# Altium PCB dc_power_backup_module_v1.PcbDoc (part 4 of 4)
Units mil, origin at the board's own origin, x right, y up, seen from the top; angles counter-clockwise.
Board outline 3300 x 2890 mil, 2 copper layers (Top Layer, Bottom Layer); 44 components, 21 nets, 171 pads, 32 vias.
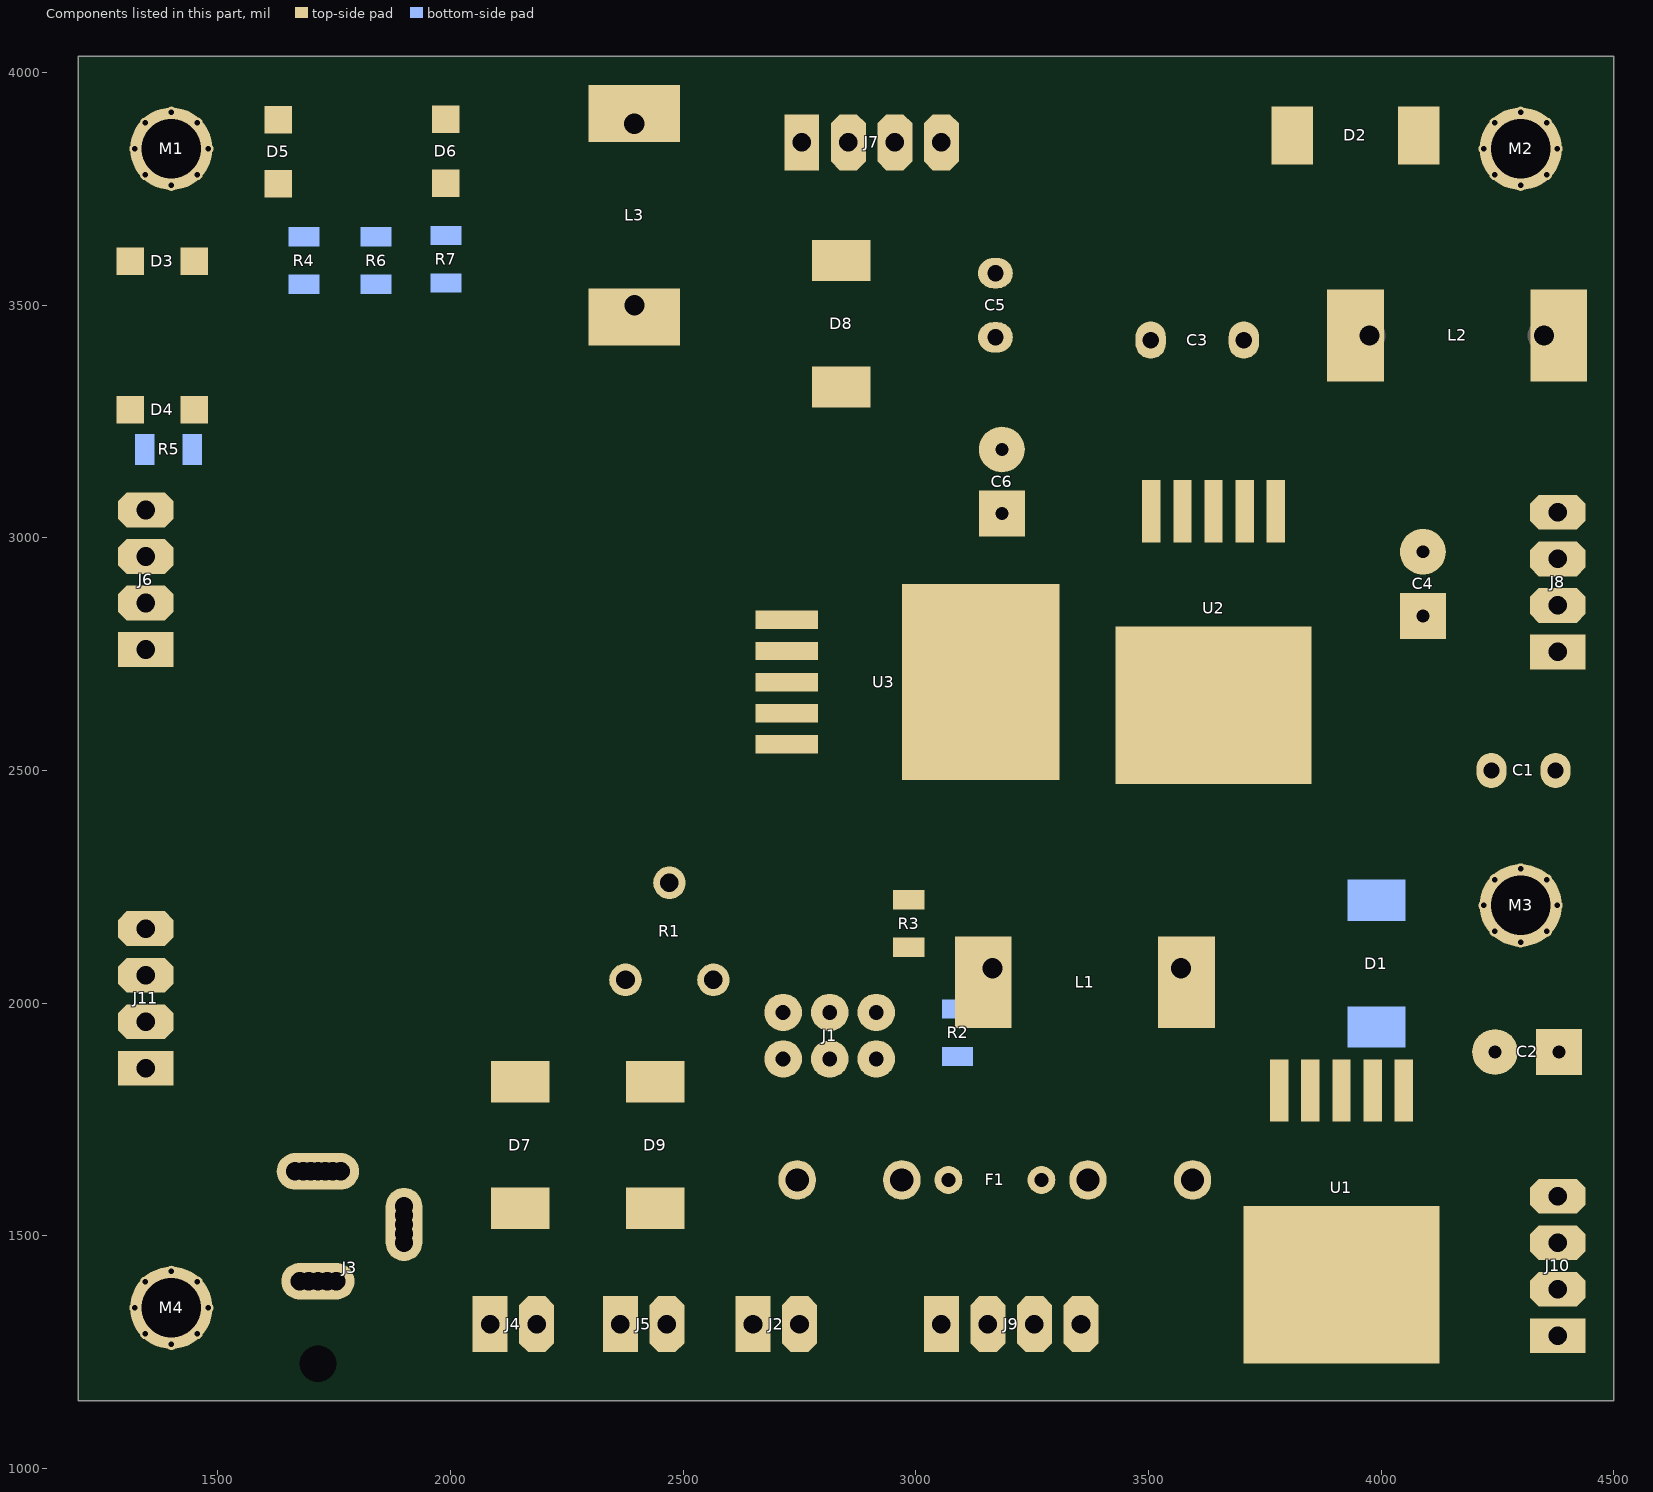
[diagram p4: the components of this part, seen from the top]

## Via types
v1: diameter 50, hole 28, Top Layer to Bottom Layer, 32 vias

## Nets (pads, with @x,y where several pads share a name; then routed paths per layer and width w, separated by ;. In a path a pad name is that pad's centre, name@x,y a point inside that pad or via, vN(x,y) a via of type N, cw(c..) or ccw(c..) an arc to the next point about the centre after c; other vN are vias at no path point) (continued)
copper on no net: (continued)
  Top Layer w0.3: 2161.4,2320.1 2163.8,2320.1 ; 2161.4,2333 2168.9,2333 ; 2161.4,2337.2 2168.9,2337.2 ; 2161.4,2337.5 2168.9,2337.5 ; 2161.4,2369.9 2168.9,2369.9 ; 2161.4,2370.2 2168.9,2370.2 ; 2161.4,2374.4 2168.9,2374.4 ; 2161.4,2462.6 2174.6,2462.6 ; 2161.4,2566.7 2164.7,2566.7 ; 2161.7,2310.5 2163.8,2310.5 ; 2161.7,2310.8 2163.8,2310.8 ; 2161.7,2311.1 2163.8,2311.1 ; 2161.7,2311.4 2163.8,2311.4 ; 2161.7,2311.7 2163.8,2311.7 ; 2161.7,2312 2163.8,2312 ; 2161.7,2312.3 2163.8,2312.3 ; 2161.7,2312.6 2163.8,2312.6 ; 2161.7,2312.9 2163.8,2312.9 ; 2161.7,2313.2 2163.8,2313.2 ; 2161.7,2313.5 2163.8,2313.5 ; 2161.7,2313.8 2163.8,2313.8 ; 2161.7,2314.1 2163.8,2314.1 ; 2161.7,2314.4 2163.8,2314.4 ; 2161.7,2314.7 2163.8,2314.7 ; 2161.7,2315 2163.8,2315 ; 2161.7,2315.3 2163.8,2315.3 ; 2161.7,2315.6 2163.8,2315.6 ; 2161.7,2315.9 2163.8,2315.9 ; 2161.7,2316.2 2163.8,2316.2 ; 2161.7,2316.5 2163.8,2316.5 ; 2161.7,2316.8 2163.8,2316.8 ; 2161.7,2317.1 2163.8,2317.1 ; 2161.7,2317.4 2163.8,2317.4 ; 2161.7,2317.7 2163.8,2317.7 ; 2161.7,2318 2163.8,2318 ; 2161.7,2318.3 2163.8,2318.3 ; 2161.7,2318.6 2163.8,2318.6 ; 2161.7,2318.9 2163.8,2318.9 ; 2161.7,2332.4 2168.6,2332.4 ; 2161.7,2332.7 2168.6,2332.7 ; 2161.7,2337.8 2168.6,2337.8 ; 2161.7,2369.6 2168.6,2369.6 ; 2161.7,2374.7 2168.9,2374.7 ; 2161.7,2375 2168.6,2375 ; 2162,2332.1 2168.3,2332.1 ; 2162,2338.1 2168.3,2338.1 ; 2162,2369.3 2168.3,2369.3 ; 2162,2375.3 2168.3,2375.3 ; 2162,2462.9 2175.2,2462.9 ; 2162,2567 2165,2567 ; 2162.3,2331.8 2168,2331.8 ; 2162.3,2338.4 2168,2338.4 ; 2162.3,2369 2168,2369 ; 2162.3,2375.6 2168,2375.6 ; 2162.3,2567.3 2165.3,2567.3 ; 2162.6,2338.7 2167.7,2338.7 ; 2162.6,2368.7 2167.7,2368.7 ; 2162.6,2567.6 2165.6,2567.6 ; 2162.6,2639 2206.1,2639 ; 2162.9,2331.5 2167.4,2331.5 ; 2162.9,2375.9 2167.4,2375.9 ; 2162.9,2463.2 2175.8,2463.2 ; 2162.9,2567.9 2166.2,2567.9 ; 2163.2,2339 2167.1,2339 ; 2163.2,2368.4 2167.1,2368.4 ; 2163.2,2376.2 2167.1,2376.2 ; 2163.2,2568.2 2166.5,2568.2 ; 2163.5,2331.2 2167.1,2331.2 ; 2163.5,2463.5 2176.4,2463.5 ; 2163.5,2568.5 2166.8,2568.5 ; 2163.8,2568.8 2167.1,2568.8 ; 2164.1,2339.3 2166.2,2339.3 ; 2164.1,2368.1 2166.2,2368.1 ; 2164.1,2463.8 2177,2463.8 ; 2164.4,2330.9 2165.9,2330.9 ; 2164.4,2376.5 2165.9,2376.5 ; 2164.4,2569.1 2167.7,2569.1 ; 2164.4,2638.7 2206.7,2638.7 ; 2164.7,2464.1 2177.6,2464.1 ; 2164.7,2569.4 2168,2569.4 ; 2165,2569.7 2168.3,2569.7 ; 2165.3,2464.4 2177.9,2464.4 ; 2165.3,2570 2168.6,2570 ; 2165.6,2570.3 2168.9,2570.3 ; 2165.9,2464.7 2178.5,2464.7 ; 2165.9,2570.6 2169.5,2570.6 ; 2165.9,2638.4 2207,2638.4 ; 2166.2,2570.9 2169.8,2570.9 ; 2166.5,2465 2179.1,2465 ; 2166.8,2571.2 2170.1,2571.2 ; 2167.1,2465.3 2179.7,2465.3 ; 2167.1,2571.5 2170.4,2571.5 ; 2167.4,2571.8 2171,2571.8 ; 2167.4,2638.1 2207.6,2638.1 ; 2167.7,2465.6 2180.3,2465.6 ; 2167.7,2572.1 2171.3,2572.1 ; 2168,2572.4 2171.6,2572.4 ; 2168.3,2465.9 2180.9,2465.9 ; 2168.3,2572.7 2171.9,2572.7 ; 2168.6,2466.2 2181.2,2466.2 ; 2168.6,2573 2172.5,2573 ; 2168.9,2573.3 2172.8,2573.3 ; 2168.9,2637.8 2207.9,2637.8 ; 2169.2,2466.5 2181.8,2466.5 ; 2169.5,2573.6 2173.1,2573.6 ; 2169.8,2466.8 2182.4,2466.8 ; 2169.8,2573.9 2173.4,2573.9 ; 2170.1,2574.2 2173.7,2574.2 ; 2170.1,2637.5 2208.5,2637.5 ; 2170.4,2467.1 2182.7,2467.1 ; 2170.4,2574.5 2174.3,2574.5 ; 2170.7,2574.8 2174.6,2574.8 ; 2171,2333 2179.7,2333 ; 2171,2374.4 2179.7,2374.4 ; 2171,2467.4 2183.3,2467.4 ; 2171,2575.1 2174.9,2575.1 ; 2171,2637.2 2209.1,2637.2 ; 2171.3,2331.5 2179.4,2331.5 ; 2171.3,2331.8 2179.4,2331.8 ; 2171.3,2332.1 2179.7,2332.1 ; 2171.3,2332.4 2179.7,2332.4 ; 2171.3,2332.7 2179.7,2332.7 ; 2171.3,2333.3 2179.7,2333.3 ; 2171.3,2333.6 2179.7,2333.6 ; 2171.3,2333.9 2179.7,2333.9 ; 2171.3,2334.2 2179.7,2334.2 ; 2171.3,2334.5 2179.4,2334.5 ; 2171.3,2334.8 2179.4,2334.8 ; 2171.3,2372.9 2179.4,2372.9 ; 2171.3,2373.2 2179.7,2373.2 ; 2171.3,2373.5 2179.7,2373.5 ; 2171.3,2373.8 2179.7,2373.8 ; 2171.3,2374.1 2179.7,2374.1 ; 2171.3,2374.7 2179.7,2374.7 ; 2171.3,2375 2179.7,2375 ; 2171.3,2375.3 2179.7,2375.3 ; 2171.3,2375.6 2179.4,2375.6 ; 2171.3,2375.9 2179.4,2375.9 ; 2171.3,2467.7 2183.9,2467.7 ; 2171.3,2575.4 2175.2,2575.4 ; 2171.6,2330.9 2179.1,2330.9 ; 2171.6,2331.2 2179.4,2331.2 ; 2171.6,2335.1 2179.4,2335.1 ; 2171.6,2372.3 2179.1,2372.3 ; 2171.6,2372.6 2179.4,2372.6 ; 2171.6,2376.2 2179.4,2376.2 ; 2171.6,2376.5 2179.1,2376.5 ; 2171.9,2330.6 2179.1,2330.6 ; 2171.9,2335.4 2179.1,2335.4 ; 2171.9,2335.7 2178.8,2335.7 ; 2171.9,2371.7 2178.8,2371.7 ; 2171.9,2372 2179.1,2372 ; 2171.9,2376.8 2179.1,2376.8 ; 2171.9,2468 2184.2,2468 ; 2171.9,2575.7 2175.8,2575.7 ; 2172.2,2330.3 2178.8,2330.3 ; 2172.2,2336 2178.5,2336 ; 2172.2,2371.4 2178.5,2371.4 ; 2172.2,2377.1 2178.8,2377.1 ; 2172.2,2576 2176.1,2576 ; 2172.2,2636.9 2209.4,2636.9 ; 2172.5,2330 2178.5,2330 ; 2172.5,2336.3 2178.2,2336.3 ; 2172.5,2371.1 2178.2,2371.1 ; 2172.5,2377.4 2178.5,2377.4 ; 2172.5,2468.3 2184.8,2468.3 ; 2172.5,2576.3 2176.4,2576.3 ; 2172.8,2329.7 2178.2,2329.7 ; 2172.8,2336.6 2177.9,2336.6 ; 2172.8,2370.8 2177.9,2370.8 ; 2172.8,2377.7 2178.2,2377.7 ; 2172.8,2468.6 2185.4,2468.6 ; 2172.8,2576.6 2176.7,2576.6 ; 2173.1,2329.4 2177.6,2329.4 ; 2173.1,2378 2177.6,2378 ; 2173.1,2576.9 2177,2576.9 ; 2173.1,2636.6 2210,2636.6 ; 2173.4,2336.9 2177.6,2336.9 ; 2173.4,2370.5 2177.3,2370.5 ; 2173.4,2468.9 2185.7,2468.9 ; 2173.4,2577.2 2177.6,2577.2 ; 2173.7,2329.1 2177,2329.1 ; 2173.7,2378.3 2177.3,2378.3 ; 2173.7,2577.5 2177.9,2577.5 ; 2174,2337.2 2176.7,2337.2 ; 2174,2469.2 2186.3,2469.2 ; 2174.3,2370.2 2176.7,2370.2 ; 2174.3,2469.5 2186.6,2469.5 ; 2174.3,2577.8 2178.2,2577.8 ; 2174.3,2636.3 2210.3,2636.3 ; 2174.6,2312.6 2177.3,2312.6 ; 2174.6,2312.9 2177.3,2312.9 ; 2174.6,2313.2 2177,2313.2 ; 2174.6,2313.5 2177,2313.5 ; 2174.6,2313.8 2177,2313.8 ; 2174.6,2314.1 2177,2314.1 ; 2174.6,2314.4 2177,2314.4 ; 2174.6,2314.7 2177,2314.7 ; 2174.6,2315 2177,2315 ; 2174.6,2315.3 2177,2315.3 ; 2174.6,2315.6 2177,2315.6 ; 2174.6,2315.9 2177.3,2315.9 ; 2174.6,2316.2 2177.3,2316.2 ; 2174.6,2578.1 2178.5,2578.1 ; 2174.9,2311.7 2177.6,2311.7 ; 2174.9,2312 2177.3,2312 ; 2174.9,2312.3 2177.3,2312.3 ; 2174.9,2316.5 2177.3,2316.5 ; 2174.9,2316.8 2177.3,2316.8 ; 2174.9,2317.1 2177.3,2317.1 ; 2174.9,2317.4 2177.6,2317.4 ; 2174.9,2378.6 2176.1,2378.6 ; 2174.9,2469.8 2187.2,2469.8 ; 2174.9,2578.4 2179.1,2578.4 ; 2175.2,2311.1 2177.6,2311.1 ; 2175.2,2311.4 2177.6,2311.4 ; 2175.2,2317.7 2177.6,2317.7 ; 2175.2,2318 2177.6,2318 ; 2175.2,2470.1 2187.5,2470.1 ; 2175.2,2578.7 2179.4,2578.7 ; 2175.2,2636 2210.9,2636 ; 2175.5,2310.5 2178.2,2310.5 ; 2175.5,2310.8 2177.9,2310.8 ; 2175.5,2318.3 2177.9,2318.3 ; 2175.5,2318.6 2177.9,2318.6 ; 2175.5,2579 2179.7,2579 ; 2175.8,2309.9 2178.5,2309.9 ; 2175.8,2310.2 2178.2,2310.2 ; 2175.8,2318.9 2178.2,2318.9 ; 2175.8,2470.4 2188.1,2470.4 ; 2175.8,2579.3 2180,2579.3 ; 2176.1,2309.6 2179.1,2309.6 ; 2176.1,2319.2 2178.5,2319.2 ; 2176.1,2579.6 2180.6,2579.6 ; 2176.1,2635.7 2211.2,2635.7 ; 2176.4,2309.3 2179.4,2309.3 ; 2176.4,2319.5 2178.5,2319.5 ; 2176.4,2470.7 2188.4,2470.7 ; 2176.7,2309 2180,2309 ; 2176.7,2319.8 2178.8,2319.8 ; 2176.7,2471 2189,2471 ; 2176.7,2579.9 2180.9,2579.9 ; 2176.7,2635.4 2211.8,2635.4 ; 2177,2320.1 2179.4,2320.1 ; 2177,2580.2 2181.2,2580.2 ; 2177.3,2320.4 2180,2320.4 ; 2177.3,2471.3 2189.3,2471.3 ; 2177.3,2580.5 2181.5,2580.5 ; 2177.6,2320.7 2181.2,2320.7 ; 2177.6,2471.6 2189.9,2471.6 ; 2177.6,2580.8 2181.8,2580.8 ; 2177.6,2635.1 2212.1,2635.1 ; 2177.9,2581.1 2182.4,2581.1 ; 2178.2,2321 2184.5,2321 ; 2178.2,2471.9 2190.2,2471.9 ; 2178.2,2581.4 2182.7,2581.4 ; 2178.5,2472.2 2190.8,2472.2 ; 2178.5,2581.7 2183,2581.7 ; 2178.5,2634.8 2212.4,2634.8 ; 2178.8,2321.3 2183.6,2321.3 ; 2179.1,2472.5 2191.1,2472.5 ; 2179.1,2582 2183.3,2582 ; 2179.1,2634.5 2213,2634.5 ; 2179.4,2472.8 2191.7,2472.8 ; 2179.4,2582.3 2183.9,2582.3 ; 2179.7,2582.6 2184.2,2582.6 ; 2180,2321.6 2182.7,2321.6 ; 2180,2473.1 2192,2473.1 ; 2180,2582.9 2184.5,2582.9 ; 2180,2634.2 2213.3,2634.2 ; 2180.3,2473.4 2192.3,2473.4 ; 2180.3,2583.2 2184.8,2583.2 ; 2180.6,2473.7 2192.9,2473.7 ; 2180.6,2583.5 2185.1,2583.5 ; 2180.6,2633.9 2213.6,2633.9 ; 2180.9,2583.8 2185.7,2583.8 ; 2181.2,2474 2193.2,2474 ; 2181.5,2329.1 2186.3,2329.1 ; 2181.5,2329.4 2187.8,2329.4 ; 2181.5,2329.7 2189.3,2329.7 ; 2181.5,2330 2190.5,2330 ; 2181.5,2330.3 2191.4,2330.3 ; 2181.5,2330.6 2192.3,2330.6 ; 2181.5,2330.9 2193.2,2330.9 ; 2181.5,2331.2 2193.8,2331.2 ; 2181.5,2331.5 2194.7,2331.5 ; 2181.5,2331.8 2195.3,2331.8 ; 2181.5,2332.1 2195.9,2332.1 ; 2181.5,2332.4 2196.5,2332.4 ; 2181.5,2332.7 2197.1,2332.7 ; 2181.5,2333 2197.7,2333 ; 2181.5,2333.3 2198,2333.3 ; 2181.5,2333.6 2198.6,2333.6 ; 2181.5,2333.9 2199.2,2333.9 ; 2181.5,2334.2 2199.5,2334.2 ; 2181.5,2334.5 2200.1,2334.5 ; 2181.5,2334.8 2200.4,2334.8 ; 2181.5,2335.1 2200.7,2335.1 ; 2181.5,2335.4 2201.3,2335.4 ; 2181.5,2335.7 2201.6,2335.7 ; 2181.5,2336 2201.9,2336 ; 2181.5,2336.3 2202.2,2336.3 ; 2181.5,2336.6 2202.5,2336.6 ; 2181.5,2336.9 2202.8,2336.9 ; 2181.5,2337.2 2203.1,2337.2 ; 2181.5,2370.2 2203.4,2370.2 ; 2181.5,2370.5 2203.1,2370.5 ; 2181.5,2370.8 2202.8,2370.8 ; 2181.5,2371.1 2202.2,2371.1 ; 2181.5,2371.4 2201.9,2371.4 ; 2181.5,2371.7 2201.6,2371.7 ; 2181.5,2372 2201.3,2372 ; 2181.5,2372.3 2201,2372.3 ; 2181.5,2372.6 2200.4,2372.6 ; 2181.5,2372.9 2200.1,2372.9 ; 2181.5,2373.2 2199.5,2373.2 ; 2181.5,2373.5 2199.2,2373.5 ; 2181.5,2373.8 2198.6,2373.8 ; 2181.5,2374.1 2198.3,2374.1 ; 2181.5,2374.4 2197.7,2374.4 ; 2181.5,2374.7 2197.1,2374.7 ; 2181.5,2375 2196.5,2375 ; 2181.5,2375.3 2195.9,2375.3 ; 2181.5,2375.6 2195.3,2375.6 ; 2181.5,2375.9 2194.7,2375.9 ; 2181.5,2376.2 2194.1,2376.2 ; 2181.5,2376.5 2193.2,2376.5 ; 2181.5,2376.8 2192.6,2376.8 ; 2181.5,2377.1 2191.7,2377.1 ; 2181.5,2377.4 2190.8,2377.4 ; 2181.5,2377.7 2189.6,2377.7 ; 2181.5,2378 2188.1,2378 ; 2181.5,2378.3 2186.6,2378.3 ; 2181.5,2378.6 2183.6,2378.6 ; 2181.5,2474.3 2193.5,2474.3 ; 2181.5,2584.1 2186,2584.1 ; 2181.5,2633.6 2214.2,2633.6 ; 2181.8,2320.7 2186,2320.7 ; 2181.8,2584.4 2186.3,2584.4 ; 2182.1,2474.6 2194.1,2474.6 ; 2182.1,2584.7 2186.6,2584.7 ; 2182.1,2633.3 2214.5,2633.3 ; 2182.4,2474.9 2194.4,2474.9 ; 2182.4,2585 2187.2,2585 ; 2182.7,2475.2 2194.7,2475.2 ; 2182.7,2585.3 2187.5,2585.3 ; 2182.7,2633 2214.8,2633 ; 2183,2320.4 2186.3,2320.4 ; 2183,2585.6 2187.8,2585.6 ; 2183.3,2337.5 2203.4,2337.5 ; 2183.3,2475.5 2195.3,2475.5 ; 2183.3,2585.9 2188.1,2585.9 ; 2183.3,2632.7 2215.1,2632.7 ; 2183.6,2309 2185.1,2309 ; 2183.6,2320.1 2186.3,2320.1 ; 2183.6,2475.8 2195.6,2475.8 ; 2183.9,2369.9 2203.7,2369.9 ; 2183.9,2586.2 2188.7,2586.2 ; 2184.2,2309.3 2185.4,2309.3 ; 2184.2,2319.8 2186.3,2319.8 ; 2184.2,2476.1 2195.9,2476.1 ; 2184.2,2586.5 2189,2586.5 ; 2184.2,2632.4 2215.7,2632.4 ; 2184.5,2309.6 2185.7,2309.6 ; 2184.5,2319.5 2186.3,2319.5 ; 2184.5,2476.4 2196.5,2476.4 ; 2184.5,2586.8 2189.3,2586.8 ; 2184.8,2309.9 2186,2309.9 ; 2184.8,2318.9 2186.3,2318.9 ; 2184.8,2319.2 2186.3,2319.2 ; 2184.8,2476.7 2196.8,2476.7 ; 2184.8,2587.1 2189.6,2587.1 ; 2184.8,2632.1 2216,2632.1 ; 2185.1,2310.2 2186.3,2310.2 ; 2185.1,2318.3 2186.3,2318.3 ; 2185.1,2318.6 2186.3,2318.6 ; 2185.1,2321 2186,2321 ; 2185.1,2587.4 2189.9,2587.4 ; 2185.4,2310.5 2186.3,2310.5 ; 2185.4,2317.7 2186.3,2317.7 ; 2185.4,2318 2186.3,2318 ; 2185.4,2321.3 2186,2321.3 ; 2185.4,2321.6 2186,2321.6 ; 2185.4,2337.8 2203.7,2337.8 ; 2185.4,2477 2197.1,2477 ; 2185.4,2587.7 2190.5,2587.7 ; 2185.4,2631.8 2216.3,2631.8 ; 2185.7,2310.8 2186.6,2310.8 ; 2185.7,2311.1 2186.6,2311.1 ; 2185.7,2317.1 2186.3,2317.1 ; 2185.7,2317.4 2186.3,2317.4 ; 2185.7,2477.3 2197.4,2477.3 ; 2185.7,2588 2190.8,2588 ; 2186,2311.4 2186.3,2311.4 ; 2186,2369.6 2204,2369.6 ; 2186,2477.6 2198,2477.6 ; 2186,2588.3 2191.1,2588.3 ; 2186,2631.5 2216.6,2631.5 ; 2186.3,2477.9 2198.3,2477.9 ; 2186.6,2588.6 2191.4,2588.6 ; 2186.6,2631.2 2216.9,2631.2 ; 2186.9,2338.1 2204,2338.1 ; 2186.9,2478.2 2198.6,2478.2 ; 2186.9,2588.9 2192,2588.9 ; 2187.2,2369.3 2204.3,2369.3 ; 2187.2,2478.5 2198.9,2478.5 ; 2187.2,2589.2 2192.3,2589.2 ; 2187.2,2630.9 2217.2,2630.9 ; 2187.5,2478.8 2199.2,2478.8 ; 2187.5,2589.5 2192.6,2589.5 ; 2187.5,2630.6 2217.8,2630.6 ; 2187.8,2589.8 2192.9,2589.8 ; 2188.1,2338.4 2204.3,2338.4 ; 2188.1,2369 2204.6,2369 ; 2188.1,2479.1 2199.8,2479.1 ; 2188.1,2590.1 2193.2,2590.1 ; 2188.1,2630.3 2218.1,2630.3 ; 2188.4,2479.4 2200.1,2479.4 ; 2188.4,2590.4 2193.8,2590.4 ; 2188.7,2479.7 2200.4,2479.7 ; 2188.7,2630 2218.4,2630 ; 2189,2338.7 2204.6,2338.7 ; 2189,2368.7 2204.6,2368.7 ; 2189,2480 2200.7,2480 ; 2189,2590.7 2194.1,2590.7 ; 2189.3,2480.3 2201,2480.3 ; 2189.3,2591 2194.4,2591 ; 2189.3,2629.7 2218.7,2629.7 ; 2189.6,2339 2204.9,2339 ; 2189.6,2591.3 2194.7,2591.3 ; 2189.9,2368.4 2204.9,2368.4 ; 2189.9,2480.6 2201.6,2480.6 ; 2189.9,2591.6 2195.3,2591.6 ; 2189.9,2629.4 2219,2629.4 ; 2190.2,2480.9 2201.9,2480.9 ; 2190.2,2591.9 2195.6,2591.9 ; 2190.5,2339.3 2205.2,2339.3 ; 2190.5,2481.2 2202.2,2481.2 ; 2190.5,2592.2 2195.9,2592.2 ; 2190.5,2629.1 2219.3,2629.1 ; 2190.8,2368.1 2205.2,2368.1 ; 2190.8,2481.5 2202.5,2481.5 ; 2190.8,2592.5 2196.2,2592.5 ; 2190.8,2628.8 2219.6,2628.8 ; 2191.1,2339.6 2205.5,2339.6 ; 2191.1,2481.8 2202.8,2481.8 ; 2191.4,2367.8 2205.5,2367.8 ; 2191.4,2592.8 2196.8,2592.8 ; 2191.4,2628.5 2219.9,2628.5 ; 2191.7,2339.9 2205.5,2339.9 ; 2191.7,2482.1 2203.1,2482.1 ; 2191.7,2593.1 2197.1,2593.1 ; 2192,2367.5 2205.8,2367.5 ; 2192,2482.4 2203.4,2482.4 ; 2192,2593.4 2197.4,2593.4 ; 2192,2628.2 2220.2,2628.2 ; 2192.3,2340.2 2205.8,2340.2 ; 2192.3,2482.7 2203.7,2482.7 ; 2192.3,2593.7 2197.7,2593.7 ; 2192.3,2627.9 2220.5,2627.9 ; 2192.6,2367.2 2205.8,2367.2 ; 2192.6,2483 2204,2483 ; 2192.6,2594 2198,2594 ; 2192.9,2340.5 2206.1,2340.5 ; 2192.9,2483.3 2204.6,2483.3 ; 2192.9,2594.3 2198.6,2594.3 ; 2192.9,2627.6 2220.8,2627.6 ; 2193.2,2366.9 2206.1,2366.9 ; 2193.2,2483.6 2204.9,2483.6 ; 2193.2,2594.6 2198.9,2594.6 ; 2193.5,2340.8 2206.4,2340.8 ; 2193.5,2366.6 2206.4,2366.6 ; 2193.5,2483.9 2205.2,2483.9 ; 2193.5,2627.3 2221.1,2627.3 ; 2193.8,2484.2 2205.5,2484.2 ; 2193.8,2594.9 2199.2,2594.9 ; 2193.8,2627 2221.4,2627 ; 2194.1,2341.1 2206.4,2341.1 ; 2194.1,2366.3 2206.7,2366.3 ; 2194.1,2484.5 2205.8,2484.5 ; 2194.1,2595.2 2199.5,2595.2 ; 2194.4,2341.4 2206.7,2341.4 ; 2194.4,2595.5 2200.1,2595.5 ; 2194.4,2626.7 2221.7,2626.7 ; 2194.7,2366 2206.7,2366 ; 2194.7,2484.8 2206.1,2484.8 ; 2194.7,2595.8 2200.4,2595.8 ; 2194.7,2626.4 2222,2626.4 ; 2195,2341.7 2207,2341.7 ; 2195,2365.7 2207,2365.7 ; 2195,2485.1 2206.4,2485.1 ; 2195,2596.1 2200.7,2596.1 ; 2195.3,2342 2207,2342 ; 2195.3,2365.4 2207.3,2365.4 ; 2195.3,2485.4 2206.7,2485.4 ; 2195.3,2596.4 2201,2596.4 ; 2195.3,2626.1 2222.3,2626.1 ; 2195.6,2342.3 2207.3,2342.3 ; 2195.6,2485.7 2207,2485.7 ; 2195.6,2596.7 2201.3,2596.7 ; 2195.9,2342.6 2207.6,2342.6 ; 2195.9,2365.1 2207.3,2365.1 ; 2195.9,2486 2207.3,2486 ; 2195.9,2625.8 2222.6,2625.8 ; 2196.2,2364.8 2207.6,2364.8 ; 2196.2,2486.3 2207.6,2486.3 ; 2196.2,2597 2201.9,2597 ; 2196.2,2625.5 2222.6,2625.5 ; 2196.5,2342.9 2207.6,2342.9 ; 2196.5,2364.5 2207.6,2364.5 ; 2196.5,2486.6 2207.9,2486.6 ; 2196.5,2597.3 2202.2,2597.3 ; 2196.8,2343.2 2207.9,2343.2 ; 2196.8,2364.2 2207.9,2364.2 ; 2196.8,2486.9 2208.2,2486.9 ; 2196.8,2597.6 2202.5,2597.6 ; 2196.8,2625.2 2222.9,2625.2 ; 2197.1,2343.5 2207.9,2343.5 ; 2197.1,2363.9 2207.9,2363.9 ; 2197.1,2487.2 2208.5,2487.2 ; 2197.1,2597.9 2202.8,2597.9 ; 2197.1,2624.9 2223.2,2624.9 ; 2197.4,2343.8 2208.2,2343.8 ; 2197.4,2363.6 2208.2,2363.6 ; 2197.4,2487.5 2208.8,2487.5 ; 2197.4,2598.2 2203.4,2598.2 ; 2197.7,2344.1 2208.2,2344.1 ; 2197.7,2363.3 2208.2,2363.3 ; 2197.7,2487.8 2209.1,2487.8 ; 2197.7,2598.5 2203.7,2598.5 ; 2197.7,2624.6 2223.5,2624.6 ; 2198,2344.4 2208.5,2344.4 ; 2198,2363 2208.5,2363 ; 2198,2488.1 2209.4,2488.1 ; 2198,2598.8 2204,2598.8 ; 2198,2624.3 2223.8,2624.3 ; 2198.3,2344.7 2208.5,2344.7 ; 2198.3,2362.7 2208.5,2362.7 ; 2198.3,2488.4 2209.7,2488.4 ; 2198.3,2624 2224.1,2624 ; 2198.6,2345 2208.8,2345 ; 2198.6,2345.3 2208.8,2345.3 ; 2198.6,2362.4 2208.8,2362.4 ; 2198.6,2488.7 2210,2488.7 ; 2198.6,2599.1 2204.3,2599.1 ; 2198.9,2345.6 2208.8,2345.6 ; 2198.9,2361.8 2209.1,2361.8 ; 2198.9,2362.1 2208.8,2362.1 ; 2198.9,2489 2210.3,2489 ; 2198.9,2599.4 2204.9,2599.4 ; 2198.9,2623.7 2224.1,2623.7 ; 2199.2,2345.9 2209.1,2345.9 ; 2199.2,2361.5 2209.1,2361.5 ; 2199.2,2489.3 2210.6,2489.3 ; 2199.2,2599.7 2205.2,2599.7 ; 2199.2,2623.4 2224.4,2623.4 ; 2199.5,2346.2 2209.1,2346.2 ; 2199.5,2346.5 2209.4,2346.5 ; 2199.5,2361.2 2209.1,2361.2 ; 2199.5,2489.6 2210.9,2489.6 ; 2199.5,2600 2205.5,2600 ; 2199.8,2346.8 2209.4,2346.8 ; 2199.8,2360.6 2209.4,2360.6 ; 2199.8,2360.9 2209.4,2360.9 ; 2199.8,2489.9 2211.2,2489.9 ; 2199.8,2600.3 2205.8,2600.3 ; 2199.8,2623.1 2224.7,2623.1 ; 2200.1,2347.1 2209.4,2347.1 ; 2200.1,2347.4 2209.7,2347.4 ; 2200.1,2360 2209.7,2360 ; 2200.1,2360.3 2209.4,2360.3 ; 2200.1,2490.2 2211.2,2490.2 ; 2200.1,2490.5 2211.5,2490.5 ; 2200.1,2600.6 2206.1,2600.6 ; 2200.1,2622.8 2225,2622.8 ; 2200.4,2347.7 2209.7,2347.7 ; 2200.4,2348 2209.7,2348 ; 2200.4,2359.4 2209.7,2359.4 ; 2200.4,2359.7 2209.7,2359.7 ; 2200.4,2490.8 2211.8,2490.8 ; 2200.4,2600.9 2206.7,2600.9 ; 2200.4,2622.5 2233.1,2622.5 ; 2200.7,2348.3 2209.7,2348.3 ; 2200.7,2348.6 2210,2348.6 ; 2200.7,2358.8 2210,2358.8 ; 2200.7,2359.1 2209.7,2359.1 ; 2200.7,2491.1 2212.1,2491.1 ; 2201,2348.9 2210,2348.9 ; 2201,2349.2 2210,2349.2 ; 2201,2358.2 2210,2358.2 ; 2201,2358.5 2210,2358.5 ; 2201,2491.4 2212.4,2491.4 ; 2201,2601.2 2207,2601.2 ; 2201,2622.2 2232.8,2622.2 ; 2201.3,2349.5 2210,2349.5 ; 2201.3,2349.8 2210,2349.8 ; 2201.3,2350.1 2210.3,2350.1 ; 2201.3,2357.3 2210.3,2357.3 ; 2201.3,2357.6 2210.3,2357.6 ; 2201.3,2357.9 2210,2357.9 ; 2201.3,2491.7 2212.7,2491.7 ; 2201.3,2601.5 2207.3,2601.5 ; 2201.3,2621.9 2232.5,2621.9 ; 2201.6,2350.4 2210.3,2350.4 ; 2201.6,2350.7 2210.3,2350.7 ; 2201.6,2351 2210.3,2351 ; 2201.6,2351.3 2210.3,2351.3 ; 2201.6,2351.6 2210.3,2351.6 ; 2201.6,2355.8 2210.3,2355.8 ; 2201.6,2356.1 2210.3,2356.1 ; 2201.6,2356.4 2210.3,2356.4 ; 2201.6,2356.7 2210.3,2356.7 ; 2201.6,2357 2210.3,2357 ; 2201.6,2492 2213,2492 ; 2201.6,2601.8 2207.6,2601.8 ; 2201.6,2621.6 2231.9,2621.6 ; 2201.9,2351.9 2210.3,2351.9 ; 2201.9,2352.2 2210.3,2352.2 ; 2201.9,2352.5 2210.3,2352.5 ; 2201.9,2352.8 2210.3,2352.8 ; 2201.9,2353.1 2210.6,2353.1 ; 2201.9,2353.4 2210.6,2353.4 ; 2201.9,2353.7 2210.6,2353.7 ; 2201.9,2354 2210.6,2354 ; 2201.9,2354.3 2210.6,2354.3 ; 2201.9,2354.6 2210.6,2354.6 ; 2201.9,2354.9 2210.3,2354.9 ; 2201.9,2355.2 2210.3,2355.2 ; 2201.9,2355.5 2210.3,2355.5 ; 2201.9,2492.3 2213.3,2492.3 ; 2201.9,2602.1 2208.2,2602.1 ; 2202.2,2492.6 2213.6,2492.6 ; 2202.2,2602.4 2208.5,2602.4 ; 2202.2,2621.3 2231.6,2621.3 ; 2202.5,2492.9 2213.6,2492.9 ; 2202.5,2602.7 2208.8,2602.7 ; 2202.5,2621 2231.3,2621 ; 2202.8,2493.2 2213.9,2493.2 ; 2202.8,2493.5 2214.2,2493.5 ; 2202.8,2603 2209.1,2603 ; 2202.8,2620.7 2231,2620.7 ; 2203.1,2493.8 2214.5,2493.8 ; 2203.1,2603.3 2209.4,2603.3 ; 2203.4,2494.1 2214.8,2494.1 ; 2203.4,2620.4 2230.4,2620.4 ; 2203.7,2494.4 2215.1,2494.4 ; 2203.7,2603.6 2210,2603.6 ; 2203.7,2620.1 2230.1,2620.1 ; 2204,2494.7 2215.4,2494.7 ; 2204,2603.9 2210.3,2603.9 ; 2204,2619.8 2229.8,2619.8 ; 2204.3,2495 2215.4,2495 ; 2204.3,2495.3 2215.7,2495.3 ; 2204.3,2604.2 2210.6,2604.2 ; 2204.3,2619.5 2229.5,2619.5 ; 2204.6,2495.6 2216,2495.6 ; 2204.6,2604.5 2210.9,2604.5 ; 2204.6,2619.2 2229.2,2619.2 ; 2204.9,2495.9 2216.3,2495.9 ; 2204.9,2604.8 2211.5,2604.8 ; 2205.2,2496.2 2216.6,2496.2 ; 2205.2,2605.1 2211.8,2605.1 ; 2205.2,2618.9 2228.6,2618.9 ; 2205.5,2496.5 2216.6,2496.5 ; 2205.5,2496.8 2216.9,2496.8 ; 2205.5,2605.4 2212.1,2605.4 ; 2205.5,2618.6 2228.3,2618.6 ; 2205.8,2497.1 2217.2,2497.1 ; 2205.8,2618.3 2228,2618.3 ; 2206.1,2497.4 2217.5,2497.4 ; 2206.1,2605.7 2212.4,2605.7 ; 2206.1,2618 2228.3,2618 ; 2206.4,2497.7 2217.8,2497.7 ; 2206.4,2606 2213,2606 ; 2206.4,2617.7 2228.3,2617.7 ; 2206.7,2498 2217.8,2498 ; 2206.7,2498.3 2218.1,2498.3 ; 2206.7,2606.3 2213.3,2606.3 ; 2206.7,2617.4 2228.6,2617.4 ; 2207,2498.6 2218.4,2498.6 ; 2207,2606.6 2213.6,2606.6 ; 2207,2617.1 2228.9,2617.1 ; 2207.3,2498.9 2218.7,2498.9 ; 2207.3,2606.9 2213.9,2606.9 ; 2207.3,2616.8 2228.9,2616.8 ; 2207.6,2499.2 2218.7,2499.2 ; 2207.6,2499.5 2219,2499.5 ; 2207.6,2607.2 2214.2,2607.2 ; 2207.9,2499.8 2219.3,2499.8 ; 2207.9,2607.5 2214.8,2607.5 ; 2207.9,2616.5 2229.2,2616.5 ; 2208.2,2500.1 2219.6,2500.1 ; 2208.2,2616.2 2229.2,2616.2 ; 2208.5,2500.4 2219.6,2500.4 ; 2208.5,2500.7 2219.9,2500.7 ; 2208.5,2607.8 2215.1,2607.8 ; 2208.5,2615.9 2229.5,2615.9 ; 2208.8,2501 2220.2,2501 ; 2208.8,2608.1 2234,2608.1 ; 2208.8,2615.6 2229.8,2615.6 ; 2209.1,2501.3 2220.5,2501.3 ; 2209.1,2608.4 2233.7,2608.4 ; 2209.1,2615.3 2229.8,2615.3 ; 2209.4,2501.6 2220.5,2501.6 ; 2209.4,2501.9 2220.8,2501.9 ; 2209.4,2608.7 2233.7,2608.7 ; 2209.4,2615 2230.1,2615 ; 2209.7,2502.2 2221.1,2502.2 ; 2209.7,2609 2233.4,2609 ; 2209.7,2614.7 2230.1,2614.7 ; 2210,2502.5 2221.1,2502.5 ; 2210,2502.8 2221.4,2502.8 ; 2210,2609.3 2233.4,2609.3 ; 2210,2614.4 2230.4,2614.4 ; 2210.3,2503.1 2221.7,2503.1 ; 2210.3,2609.6 2233.1,2609.6 ; 2210.3,2614.1 2230.7,2614.1 ; 2210.6,2503.4 2221.7,2503.4 ; 2210.6,2503.7 2222,2503.7 ; 2210.6,2613.8 2230.7,2613.8 ; 2210.9,2504 2222.3,2504 ; 2210.9,2609.9 2233.1,2609.9 ; 2210.9,2613.2 2231,2613.2 ; 2210.9,2613.5 2231,2613.5 ; 2211.2,2504.3 2222.6,2504.3 ; 2211.2,2504.6 2222.6,2504.6 ; 2211.2,2610.2 2232.8,2610.2 ; 2211.2,2612.9 2231.3,2612.9 ; 2211.5,2504.9 2222.9,2504.9 ; 2211.5,2610.5 2232.5,2610.5 ; 2211.5,2612.6 2231.6,2612.6 ; 2211.8,2505.2 2223.2,2505.2 ; 2211.8,2505.5 2223.2,2505.5 ; 2211.8,2610.8 2232.5,2610.8 ; 2211.8,2612.3 2231.6,2612.3 ; 2212.1,2505.8 2223.5,2505.8 ; 2212.1,2611.1 2232.2,2611.1 ; 2212.1,2612 2231.9,2612 ; 2212.4,2506.1 2223.5,2506.1 ; 2212.4,2506.4 2223.8,2506.4 ; 2212.4,2611.4 2232.2,2611.4 ; 2212.4,2611.7 2231.9,2611.7 ; 2212.7,2506.7 2224.1,2506.7 ; 2213,2507 2224.1,2507 ; 2213,2507.3 2224.4,2507.3 ; 2213.3,2507.6 2224.7,2507.6 ; 2213.3,2507.9 2224.7,2507.9 ; 2213.6,2508.2 2225,2508.2 ; 2213.9,2508.5 2225.3,2508.5 ; 2213.9,2508.8 2225.3,2508.8 ; 2214.2,2509.1 2225.6,2509.1 ; 2214.2,2509.4 2225.6,2509.4 ; 2214.5,2509.7 2225.9,2509.7 ; 2214.8,2510 2226.2,2510 ; 2214.8,2510.3 2226.2,2510.3 ; 2215.1,2510.6 2226.5,2510.6 ; 2215.1,2510.9 2226.5,2510.9 ; 2215.4,2511.2 2226.8,2511.2 ; 2215.4,2511.5 2227.1,2511.5 ; 2215.4,2607.8 2234,2607.8 ; 2215.7,2511.8 2227.1,2511.8 ; 2215.7,2607.5 2234.3,2607.5 ; 2216,2512.1 2227.4,2512.1 ; 2216,2512.4 2227.4,2512.4 ; 2216,2607.2 2234.3,2607.2 ; 2216.3,2512.7 2227.7,2512.7 ; 2216.3,2513 2227.7,2513 ; 2216.3,2606.6 2234.6,2606.6 ; 2216.3,2606.9 2234.6,2606.9 ; 2216.6,2513.3 2228,2513.3 ; 2216.6,2513.6 2228.3,2513.6 ; 2216.6,2606.3 2234.9,2606.3 ; 2216.9,2513.9 2228.3,2513.9 ; 2216.9,2514.2 2228.6,2514.2 ; 2216.9,2606 2234.9,2606 ; 2217.2,2514.5 2228.6,2514.5 ; 2217.2,2514.8 2228.9,2514.8 ; 2217.2,2605.4 2235.2,2605.4 ; 2217.2,2605.7 2235.2,2605.7 ; 2217.5,2515.1 2228.9,2515.1 ; 2217.5,2515.4 2229.2,2515.4 ; 2217.5,2605.1 2235.5,2605.1 ; 2217.8,2515.7 2229.2,2515.7 ; 2217.8,2516 2229.5,2516 ; 2217.8,2604.5 2235.8,2604.5 ; 2217.8,2604.8 2235.5,2604.8 ; 2218.1,2516.3 2229.8,2516.3 ; 2218.1,2516.6 2229.8,2516.6 ; 2218.1,2603.9 2236.1,2603.9 ; 2218.1,2604.2 2235.8,2604.2 ; 2218.4,2516.9 2230.1,2516.9 ; 2218.4,2517.2 2230.1,2517.2 ; 2218.4,2603.6 2236.1,2603.6 ; 2218.7,2517.5 2230.4,2517.5 ; 2218.7,2517.8 2230.4,2517.8 ; 2218.7,2603 2236.4,2603 ; 2218.7,2603.3 2236.4,2603.3 ; 2219,2518.1 2230.7,2518.1 ; 2219,2518.4 2230.7,2518.4 ; 2219,2602.7 2236.7,2602.7 ; 2219.3,2518.7 2231,2518.7 ; 2219.3,2519 2231,2519 ; 2219.3,2602.1 2236.7,2602.1 ; 2219.3,2602.4 2236.7,2602.4 ; 2219.6,2519.3 2231.3,2519.3 ; 2219.6,2519.6 2231.3,2519.6 ; 2219.6,2601.5 2237,2601.5 ; 2219.6,2601.8 2237,2601.8 ; 2219.9,2519.9 2231.6,2519.9 ; 2219.9,2520.2 2231.6,2520.2 ; 2219.9,2520.5 2231.9,2520.5 ; 2219.9,2601.2 2237.3,2601.2 ; 2220.2,2520.8 2231.9,2520.8 ; 2220.2,2521.1 2232.2,2521.1 ; 2220.2,2600.6 2237.3,2600.6 ; 2220.2,2600.9 2237.3,2600.9 ; 2220.5,2521.4 2232.2,2521.4 ; 2220.5,2521.7 2232.5,2521.7 ; 2220.5,2600 2237.6,2600 ; 2220.5,2600.3 2237.6,2600.3 ; 2220.8,2522 2232.5,2522 ; 2220.8,2522.3 2232.8,2522.3 ; 2220.8,2599.4 2237.9,2599.4 ; 2220.8,2599.7 2237.9,2599.7 ; 2221.1,2522.6 2232.8,2522.6 ; 2221.1,2522.9 2233.1,2522.9 ; 2221.1,2523.2 2233.1,2523.2 ; 2221.1,2598.8 2238.2,2598.8 ; 2221.1,2599.1 2237.9,2599.1 ; 2221.4,2523.5 2233.4,2523.5 ; 2221.4,2523.8 2233.4,2523.8 ; 2221.4,2598.2 2238.2,2598.2 ; 2221.4,2598.5 2238.2,2598.5 ; 2221.7,2524.1 2233.4,2524.1 ; 2221.7,2524.4 2233.7,2524.4 ; 2221.7,2524.7 2233.7,2524.7 ; 2221.7,2597.6 2238.5,2597.6 ; 2221.7,2597.9 2238.5,2597.9 ; 2222,2525 2234,2525 ; 2222,2525.3 2234,2525.3 ; 2222,2597 2238.8,2597 ; 2222,2597.3 2238.5,2597.3 ; 2222.3,2525.6 2234.3,2525.6 ; 2222.3,2525.9 2234.3,2525.9 ; 2222.3,2526.2 2234.6,2526.2 ; 2222.3,2596.4 2238.8,2596.4 ; 2222.3,2596.7 2238.8,2596.7 ; 2222.6,2526.5 2234.6,2526.5 ; 2222.6,2526.8 2234.9,2526.8 ; 2222.6,2527.1 2234.9,2527.1 ; 2222.6,2595.8 2239.1,2595.8 ; 2222.6,2596.1 2239.1,2596.1 ; 2222.9,2527.4 2234.9,2527.4 ; 2222.9,2527.7 2235.2,2527.7 ; 2222.9,2528 2235.2,2528 ; 2222.9,2595.2 2239.4,2595.2 ; 2222.9,2595.5 2239.1,2595.5 ; 2223.2,2528.3 2235.5,2528.3 ; 2223.2,2528.6 2235.5,2528.6 ; 2223.2,2594.3 2239.4,2594.3 ; 2223.2,2594.6 2239.4,2594.6 ; 2223.2,2594.9 2239.4,2594.9 ; 2223.5,2528.9 2235.8,2528.9 ; 2223.5,2529.2 2235.8,2529.2 ; 2223.5,2529.5 2235.8,2529.5 ; 2223.5,2593.7 2239.7,2593.7 ; 2223.5,2594 2239.7,2594 ; 2223.8,2529.8 2236.1,2529.8 ; 2223.8,2530.1 2236.1,2530.1 ; 2223.8,2530.4 2236.4,2530.4 ; 2223.8,2592.8 2239.7,2592.8 ; 2223.8,2593.1 2239.7,2593.1 ; 2223.8,2593.4 2239.7,2593.4 ; 2224.1,2530.7 2236.4,2530.7 ; 2224.1,2531 2236.7,2531 ; 2224.1,2531.3 2236.7,2531.3 ; 2224.1,2592.2 2240,2592.2 ; 2224.1,2592.5 2240,2592.5 ; 2224.4,2531.6 2236.7,2531.6 ; 2224.4,2531.9 2237,2531.9 ; 2224.4,2532.2 2237,2532.2 ; 2224.4,2532.5 2237,2532.5 ; 2224.4,2591.3 2240.3,2591.3 ; 2224.4,2591.6 2240,2591.6 ; 2224.4,2591.9 2240,2591.9 ; 2224.7,2532.8 2237.3,2532.8 ; 2224.7,2533.1 2237.3,2533.1 ; 2224.7,2533.4 2237.3,2533.4 ; 2224.7,2590.4 2240.3,2590.4 ; 2224.7,2590.7 2240.3,2590.7 ; 2224.7,2591 2240.3,2591 ; 2225,2533.7 2237.6,2533.7 ; 2225,2534 2237.6,2534 ; 2225,2534.3 2237.6,2534.3 ; 2225,2589.8 2240.6,2589.8 ; 2225,2590.1 2240.3,2590.1 ; 2225.3,2534.6 2237.9,2534.6 ; 2225.3,2534.9 2237.9,2534.9 ; 2225.3,2535.2 2237.9,2535.2 ; 2225.3,2535.5 2238.2,2535.5 ; 2225.3,2588.9 2240.6,2588.9 ; 2225.3,2589.2 2240.6,2589.2 ; 2225.3,2589.5 2240.6,2589.5 ; 2225.6,2535.8 2238.2,2535.8 ; 2225.6,2536.1 2238.2,2536.1 ; 2225.6,2536.4 2238.2,2536.4 ; 2225.6,2536.7 2238.5,2536.7 ; 2225.6,2588 2240.9,2588 ; 2225.6,2588.3 2240.9,2588.3 ; 2225.6,2588.6 2240.6,2588.6 ; 2225.6,2622.8 2233.4,2622.8 ; 2225.9,2537 2238.5,2537 ; 2225.9,2537.3 2238.5,2537.3 ; 2225.9,2537.6 2238.8,2537.6 ; 2225.9,2537.9 2238.8,2537.9 ; 2225.9,2586.8 2240.9,2586.8 ; 2225.9,2587.1 2240.9,2587.1 ; 2225.9,2587.4 2240.9,2587.4 ; 2225.9,2587.7 2240.9,2587.7 ; 2225.9,2623.1 2233.7,2623.1 ; 2226.2,2538.2 2238.8,2538.2 ; 2226.2,2538.5 2238.8,2538.5 ; 2226.2,2538.8 2239.1,2538.8 ; 2226.2,2539.1 2239.1,2539.1 ; 2226.2,2585.9 2241.2,2585.9 ; 2226.2,2586.2 2241.2,2586.2 ; 2226.2,2586.5 2241.2,2586.5 ; 2226.2,2623.4 2234.3,2623.4 ; 2226.5,2539.4 2239.1,2539.4 ; 2226.5,2539.7 2239.1,2539.7 ; 2226.5,2540 2239.4,2540 ; 2226.5,2540.3 2239.4,2540.3 ; 2226.5,2584.7 2241.5,2584.7 ; 2226.5,2585 2241.2,2585 ; 2226.5,2585.3 2241.2,2585.3 ; 2226.5,2585.6 2241.2,2585.6 ; 2226.5,2623.7 2234.6,2623.7 ; 2226.8,2540.6 2239.4,2540.6 ; 2226.8,2540.9 2239.4,2540.9 ; 2226.8,2541.2 2239.7,2541.2 ; 2226.8,2541.5 2239.7,2541.5 ; 2226.8,2541.8 2239.7,2541.8 ; 2226.8,2583.8 2241.5,2583.8 ; 2226.8,2584.1 2241.5,2584.1 ; 2226.8,2584.4 2241.5,2584.4 ; 2226.8,2624 2234.9,2624 ; 2227.1,2542.1 2239.7,2542.1 ; 2227.1,2542.4 2240,2542.4 ; 2227.1,2542.7 2240,2542.7 ; 2227.1,2543 2240,2543 ; 2227.1,2543.3 2240,2543.3 ; 2227.1,2582.3 2241.8,2582.3 ; 2227.1,2582.6 2241.8,2582.6 ; 2227.1,2582.9 2241.8,2582.9 ; 2227.1,2583.2 2241.5,2583.2 ; 2227.1,2583.5 2241.5,2583.5 ; 2227.1,2624.3 2235.2,2624.3 ; 2227.4,2543.6 2240,2543.6 ; 2227.4,2543.9 2240.3,2543.9 ; 2227.4,2544.2 2240.3,2544.2 ; 2227.4,2544.5 2240.3,2544.5 ; 2227.4,2544.8 2240.3,2544.8 ; 2227.4,2580.8 2241.8,2580.8 ; 2227.4,2581.1 2241.8,2581.1 ; 2227.4,2581.4 2241.8,2581.4 ; 2227.4,2581.7 2241.8,2581.7 ; 2227.4,2582 2241.8,2582 ; 2227.4,2624.6 2235.8,2624.6 ; 2227.7,2545.1 2240.6,2545.1 ; 2227.7,2545.4 2240.6,2545.4 ; 2227.7,2545.7 2240.6,2545.7 ; 2227.7,2546 2240.6,2546 ; 2227.7,2546.3 2240.6,2546.3 ; 2227.7,2546.6 2240.9,2546.6 ; 2227.7,2579.3 2242.1,2579.3 ; 2227.7,2579.6 2242.1,2579.6 ; 2227.7,2579.9 2242.1,2579.9 ; 2227.7,2580.2 2242.1,2580.2 ; 2227.7,2580.5 2242.1,2580.5 ; 2228,2546.9 2240.9,2546.9 ; 2228,2547.2 2240.9,2547.2 ; 2228,2547.5 2240.9,2547.5 ; 2228,2547.8 2240.9,2547.8 ; 2228,2548.1 2240.9,2548.1 ; 2228,2548.4 2241.2,2548.4 ; 2228,2548.7 2241.2,2548.7 ; 2228,2577.2 2242.4,2577.2 ; 2228,2577.5 2242.4,2577.5 ; 2228,2577.8 2242.1,2577.8 ; 2228,2578.1 2242.1,2578.1 ; 2228,2578.4 2242.1,2578.4 ; 2228,2578.7 2242.1,2578.7 ; 2228,2579 2242.1,2579 ; 2228,2624.9 2236.1,2624.9 ; 2228,2635.4 2249,2635.4 ; 2228.3,2549 2241.2,2549 ; 2228.3,2549.3 2241.2,2549.3 ; 2228.3,2549.6 2241.2,2549.6 ; 2228.3,2549.9 2241.2,2549.9 ; 2228.3,2550.2 2241.5,2550.2 ; 2228.3,2550.5 2241.5,2550.5 ; 2228.3,2550.8 2241.5,2550.8 ; 2228.3,2575.1 2242.4,2575.1 ; 2228.3,2575.4 2242.4,2575.4 ; 2228.3,2575.7 2242.4,2575.7 ; 2228.3,2576 2242.4,2576 ; 2228.3,2576.3 2242.4,2576.3 ; 2228.3,2576.6 2242.4,2576.6 ; 2228.3,2576.9 2242.4,2576.9 ; 2228.3,2625.2 2236.4,2625.2 ; 2228.6,2551.1 2241.5,2551.1 ; 2228.6,2551.4 2241.5,2551.4 ; 2228.6,2551.7 2241.5,2551.7 ; 2228.6,2552 2241.5,2552 ; 2228.6,2552.3 2241.8,2552.3 ; 2228.6,2552.6 2241.8,2552.6 ; 2228.6,2552.9 2241.8,2552.9 ; 2228.6,2553.2 2241.8,2553.2 ; 2228.6,2553.5 2241.8,2553.5 ; 2228.6,2553.8 2241.8,2553.8 ; 2228.6,2572.1 2242.7,2572.1 ; 2228.6,2572.4 2242.7,2572.4 ; 2228.6,2572.7 2242.7,2572.7 ; 2228.6,2573 2242.7,2573 ; 2228.6,2573.3 2242.7,2573.3 ; 2228.6,2573.6 2242.7,2573.6 ; 2228.6,2573.9 2242.4,2573.9 ; 2228.6,2574.2 2242.4,2574.2 ; 2228.6,2574.5 2242.4,2574.5 ; 2228.6,2574.8 2242.4,2574.8 ; 2228.6,2625.5 2236.7,2625.5 ; 2228.6,2635.1 2248.7,2635.1 ; 2228.6,2635.7 2249.3,2635.7 ; 2228.9,2554.1 2241.8,2554.1 ; 2228.9,2554.4 2242.1,2554.4 ; 2228.9,2554.7 2242.1,2554.7 ; 2228.9,2555 2242.1,2555 ; 2228.9,2555.3 2242.1,2555.3 ; 2228.9,2555.6 2242.1,2555.6 ; 2228.9,2555.9 2242.1,2555.9 ; 2228.9,2556.2 2242.1,2556.2 ; 2228.9,2556.5 2242.1,2556.5 ; 2228.9,2556.8 2242.1,2556.8 ; 2228.9,2557.1 2242.1,2557.1 ; 2228.9,2557.4 2242.4,2557.4 ; 2228.9,2557.7 2242.4,2557.7 ; 2228.9,2558 2242.4,2558 ; 2228.9,2558.3 2242.4,2558.3 ; 2228.9,2567.6 2242.7,2567.6 ; 2228.9,2567.9 2242.7,2567.9 ; 2228.9,2568.2 2242.7,2568.2 ; 2228.9,2568.5 2242.7,2568.5 ; 2228.9,2568.8 2242.7,2568.8 ; 2228.9,2569.1 2242.7,2569.1 ; 2228.9,2569.4 2242.7,2569.4 ; 2228.9,2569.7 2242.7,2569.7 ; 2228.9,2570 2242.7,2570 ; 2228.9,2570.3 2242.7,2570.3 ; 2228.9,2570.6 2242.7,2570.6 ; 2228.9,2570.9 2242.7,2570.9 ; 2228.9,2571.2 2242.7,2571.2 ; 2228.9,2571.5 2242.7,2571.5 ; 2228.9,2571.8 2242.7,2571.8 ; 2228.9,2625.8 2237.3,2625.8 ; 2229.2,2558.6 2242.4,2558.6 ; 2229.2,2558.9 2242.4,2558.9 ; 2229.2,2559.2 2242.4,2559.2 ; 2229.2,2559.5 2242.4,2559.5 ; 2229.2,2559.8 2242.4,2559.8 ; 2229.2,2560.1 2242.4,2560.1 ; 2229.2,2560.4 2242.4,2560.4 ; 2229.2,2560.7 2242.4,2560.7 ; 2229.2,2561 2242.4,2561 ; 2229.2,2561.3 2242.7,2561.3 ; 2229.2,2561.6 2242.7,2561.6 ; 2229.2,2561.9 2242.7,2561.9 ; 2229.2,2562.2 2242.7,2562.2 ; 2229.2,2562.5 2242.7,2562.5 ; 2229.2,2562.8 2242.7,2562.8 ; 2229.2,2563.1 2242.7,2563.1 ; 2229.2,2563.4 2242.7,2563.4 ; 2229.2,2563.7 2242.7,2563.7 ; 2229.2,2564 2242.7,2564 ; 2229.2,2564.3 2242.7,2564.3 ; 2229.2,2564.6 2242.7,2564.6 ; 2229.2,2564.9 2242.7,2564.9 ; 2229.2,2565.2 2242.7,2565.2 ; 2229.2,2565.5 2242.7,2565.5 ; 2229.2,2565.8 2242.7,2565.8 ; 2229.2,2566.1 2242.7,2566.1 ; 2229.2,2566.4 2242.7,2566.4 ; 2229.2,2566.7 2242.7,2566.7 ; 2229.2,2567 2242.7,2567 ; 2229.2,2567.3 2242.7,2567.3 ; 2229.2,2626.1 2237.6,2626.1 ; 2229.5,2626.4 2237.9,2626.4 ; 2229.5,2636 2249.6,2636 ; 2229.8,2626.7 2238.2,2626.7 ; 2230.1,2634.8 2248.1,2634.8 ; 2230.4,2627 2238.5,2627 ; 2230.4,2636.3 2249.9,2636.3 ; 2230.7,2627.3 2239.1,2627.3 ; 2231,2627.6 2239.4,2627.6 ; 2231.3,2627.9 2239.7,2627.9 ; 2231.3,2634.5 2247.8,2634.5 ; 2231.3,2636.6 2250.5,2636.6 ; 2231.6,2628.2 2240,2628.2 ; 2231.9,2628.5 2240.6,2628.5 ; 2232.2,2628.8 2240.9,2628.8 ; 2232.2,2636.9 2250.8,2636.9 ; 2232.8,2629.1 2241.2,2629.1 ; 2232.8,2634.2 2247.5,2634.2 ; 2233.1,2629.4 2241.5,2629.4 ; 2233.1,2637.2 2251.1,2637.2 ; 2233.4,2629.7 2241.8,2629.7 ; 2233.7,2630 2242.4,2630 ; 2234,2630.3 2242.7,2630.3 ; 2234,2633.9 2247.2,2633.9 ; 2234,2637.5 2251.4,2637.5 ; 2234.3,2630.6 2243,2630.6 ; 2234.6,2630.9 2243.3,2630.9 ; 2234.9,2631.2 2243.9,2631.2 ; 2234.9,2637.8 2252,2637.8 ; 2235.2,2633.6 2246.6,2633.6 ; 2235.5,2631.5 2244.2,2631.5 ; 2235.8,2631.8 2244.5,2631.8 ; 2235.8,2638.1 2252.3,2638.1 ; 2236.1,2632.1 2244.8,2632.1 ; 2236.4,2632.4 2245.4,2632.4 ; 2236.7,2632.7 2245.7,2632.7 ; 2236.7,2633.3 2246.3,2633.3 ; 2236.7,2638.4 2252.6,2638.4 ; 2237,2633 2246,2633 ; 2237.6,2638.7 2252.9,2638.7 ; 2238.5,2639 2253.5,2639 ; 2239.4,2639.3 2253.8,2639.3 ; 2240.6,2639.6 2254.1,2639.6 ; 2241.5,2639.9 2254.4,2639.9 ; 2242.4,2640.2 2254.7,2640.2 ; 2243.3,2640.5 2255.3,2640.5 ; 2244.2,2640.8 2255.6,2640.8 ; 2245.1,2641.1 2255.9,2641.1 ; 2246,2641.4 2256.2,2641.4 ; 2246.9,2641.7 2256.8,2641.7 ; 2247.8,2642 2257.1,2642 ; 2248.7,2642.3 2257.4,2642.3 ; 2249.6,2642.6 2257.7,2642.6 ; 2250.5,2642.9 2258,2642.9 ; 2251.4,2643.2 2258.6,2643.2 ; 2252.3,2643.5 2258.9,2643.5 ; 2253.2,2643.8 2259.2,2643.8 ; 2254.1,2644.1 2259.5,2644.1 ; 2255.3,2644.4 2260.1,2644.4 ; 2256.2,2644.7 2260.4,2644.7 ; 2257.1,2645 2260.7,2645 ; 2258,2645.3 2261,2645.3 ; 2258.9,2645.6 2261.6,2645.6 ; 2259.8,2645.9 2261.9,2645.9 ; 2260.7,2646.2 2262.2,2646.2 ; 2261.6,2646.5 2262.5,2646.5
  Top Layer w10: 3165,3790.07 3715,3790.07 3715,3910.07 3165,3910.07 3165,3790.07

## Other copper
Top Layer:
  rectangle net GND: 1565,3865 2045,3970
  rectangle net GND: 1250,3235 1350,3660
  rectangle net NetF1_1: 2715,1575 3105,1665
  rectangle net +12V: 3240,1565 3640,1670
  rectangle net VIN: 2070,1775 2525,1885
  text "+3.3V" at 2790,3955.88 h100
  text "A-Debug Lab" at 3195,3830 h100
  text "Adj" at 4325,3154.93 h100
  text "Ario Electronics" at 1510,3025.88 h100
  text "+5V" at 1275,2620.88 h100
  text "Power with Backup Module" at 1235,2503.37 h60
  text "V1.0.0" at 1395,2420.88 h100
  text ";-)" at 2739.88,2400 h200 r270
  text "ariopulse.com" at 3395,2359.77 h70
  text "18-Apr-2022" at 1385,2358.37 h60
  text "VBAT" at 1240,1720 h100
  text "+12v" at 4270,1345 h100 r90
  text "GND" at 2949.12,1245 h100 r90
  text "+" at 2566.44,1225 h100 r90
Bottom Layer:
  rectangle net +5V: 1310,3050 1370,3220
  rectangle net VBAT: 1255,1795 1430,2230
  rectangle net +5V: 1260,2700 1430,3120
  rectangle net +3.3V: 2690,3765 3120,3940
  rectangle net VADJ: 4290,2695 4470,3120
  rectangle net +12V: 4300,1225 4460,1650
  rectangle net GND: 2985,1225 3425,1395
  rectangle net GND: 1630,1355 1950,1460
  rectangle net GND: 1850,1390 1950,1615
  text "ariopulse.com" at 4146.04,3705 h100 r90

## Silkscreen, mask and mechanical layers (free items; w line width, h text height)
Mechanical 1:
  the board outline again, w10